# Altium PCB 磁导航.PcbDoc
Units mm, origin at the board's own origin, x right, y up, seen from the top; angles counter-clockwise.
Board outline 145 x 32 mm, 2 copper layers (Top Layer, Bottom Layer); 167 components, 149 nets, 519 pads, 3 vias.
Unrouted connection lines stored in the file: 330.
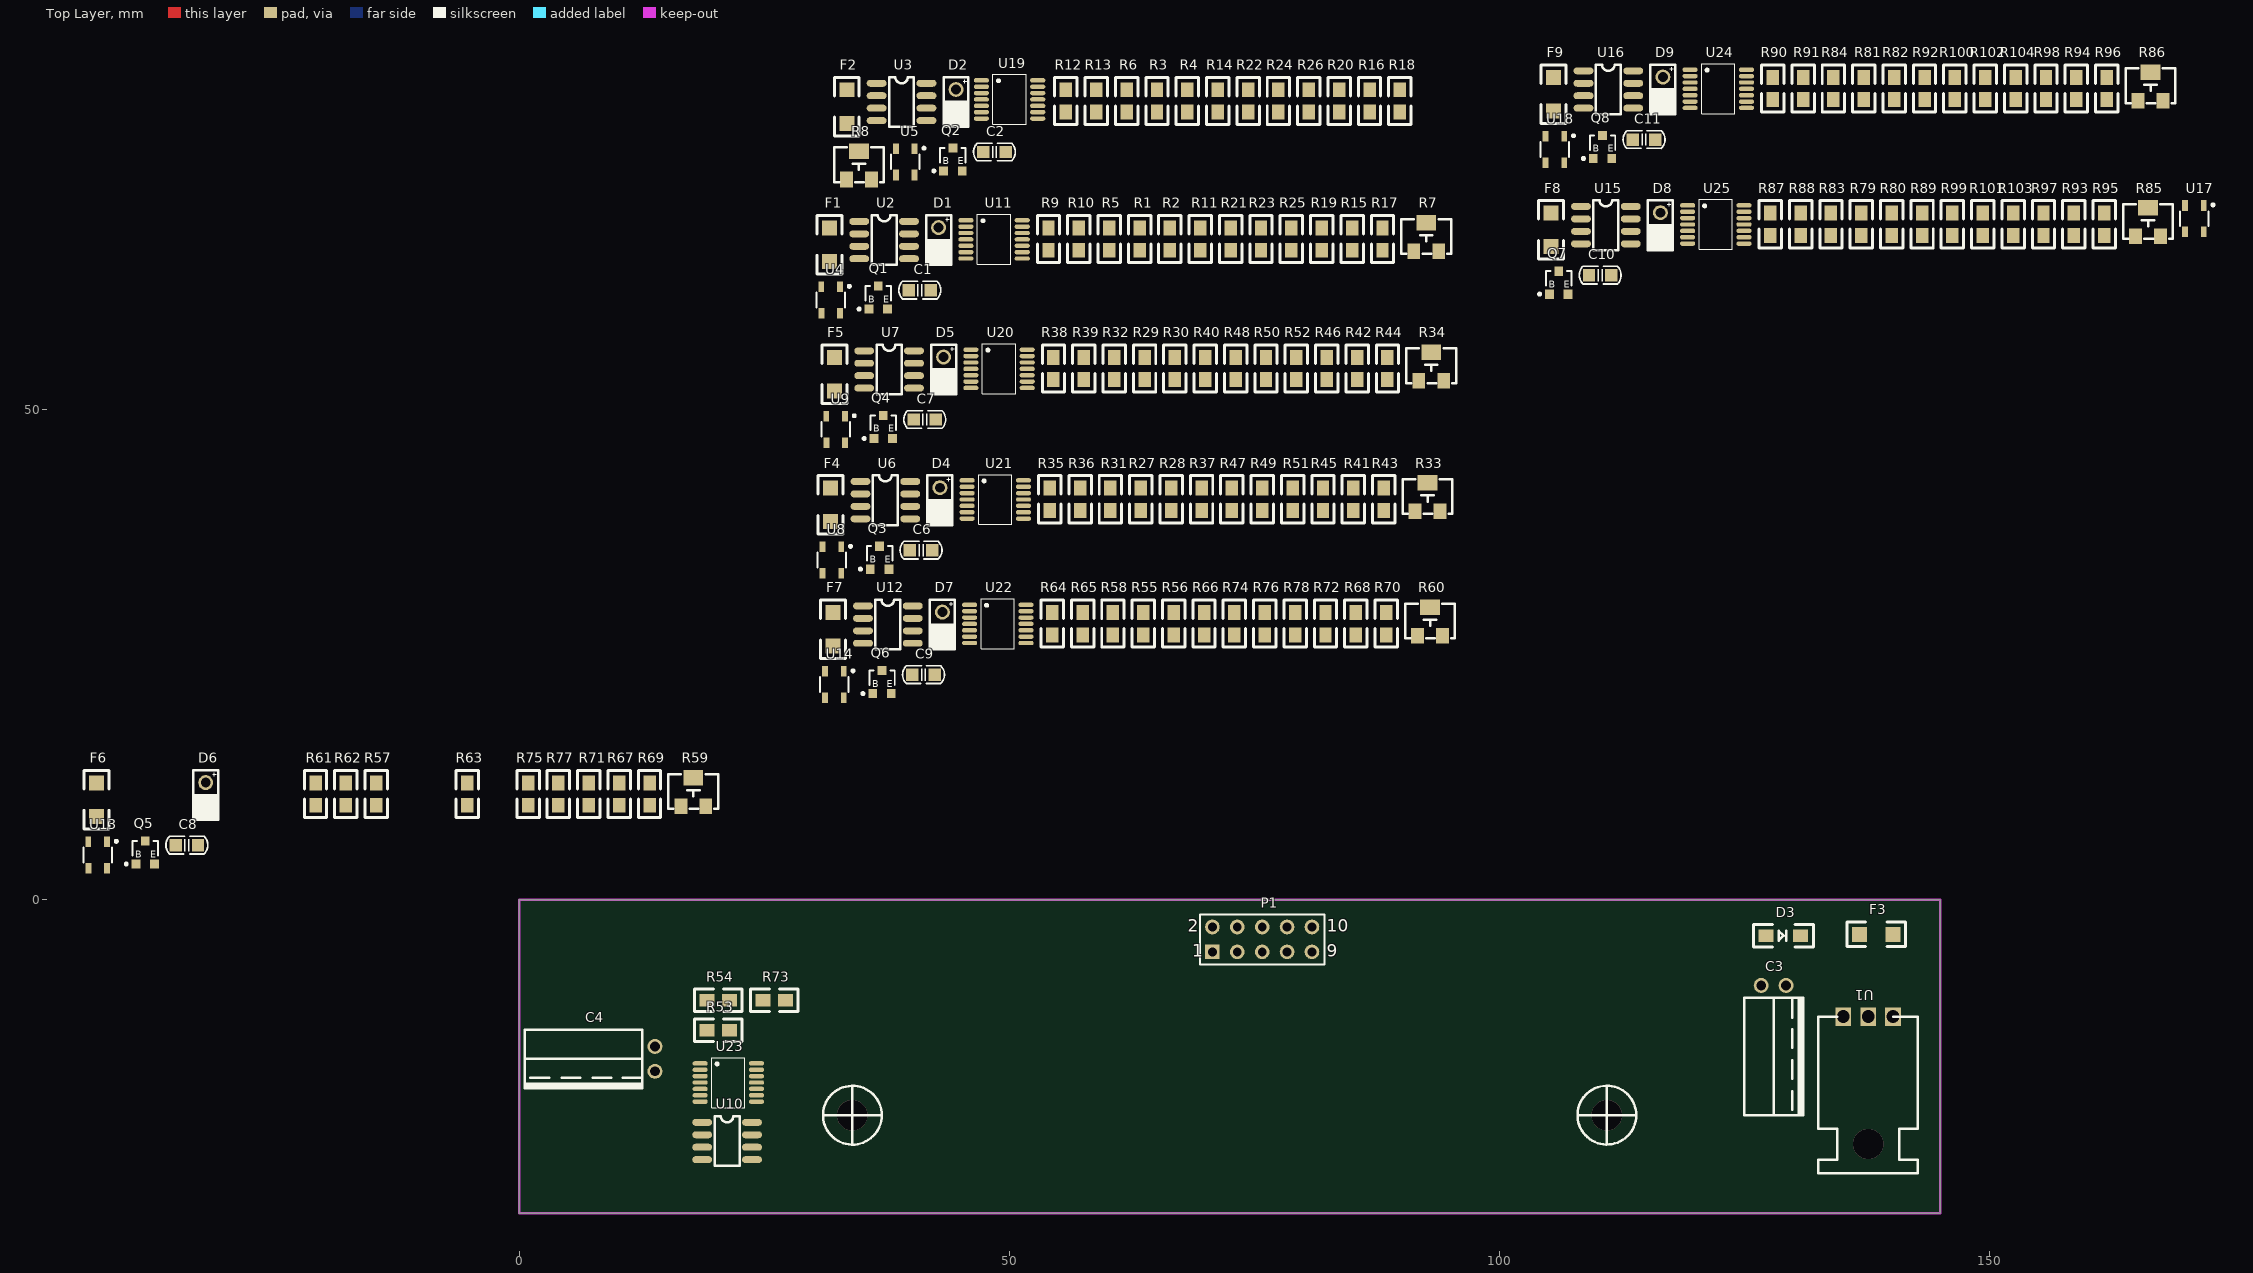
[diagram p0: Top Layer view]
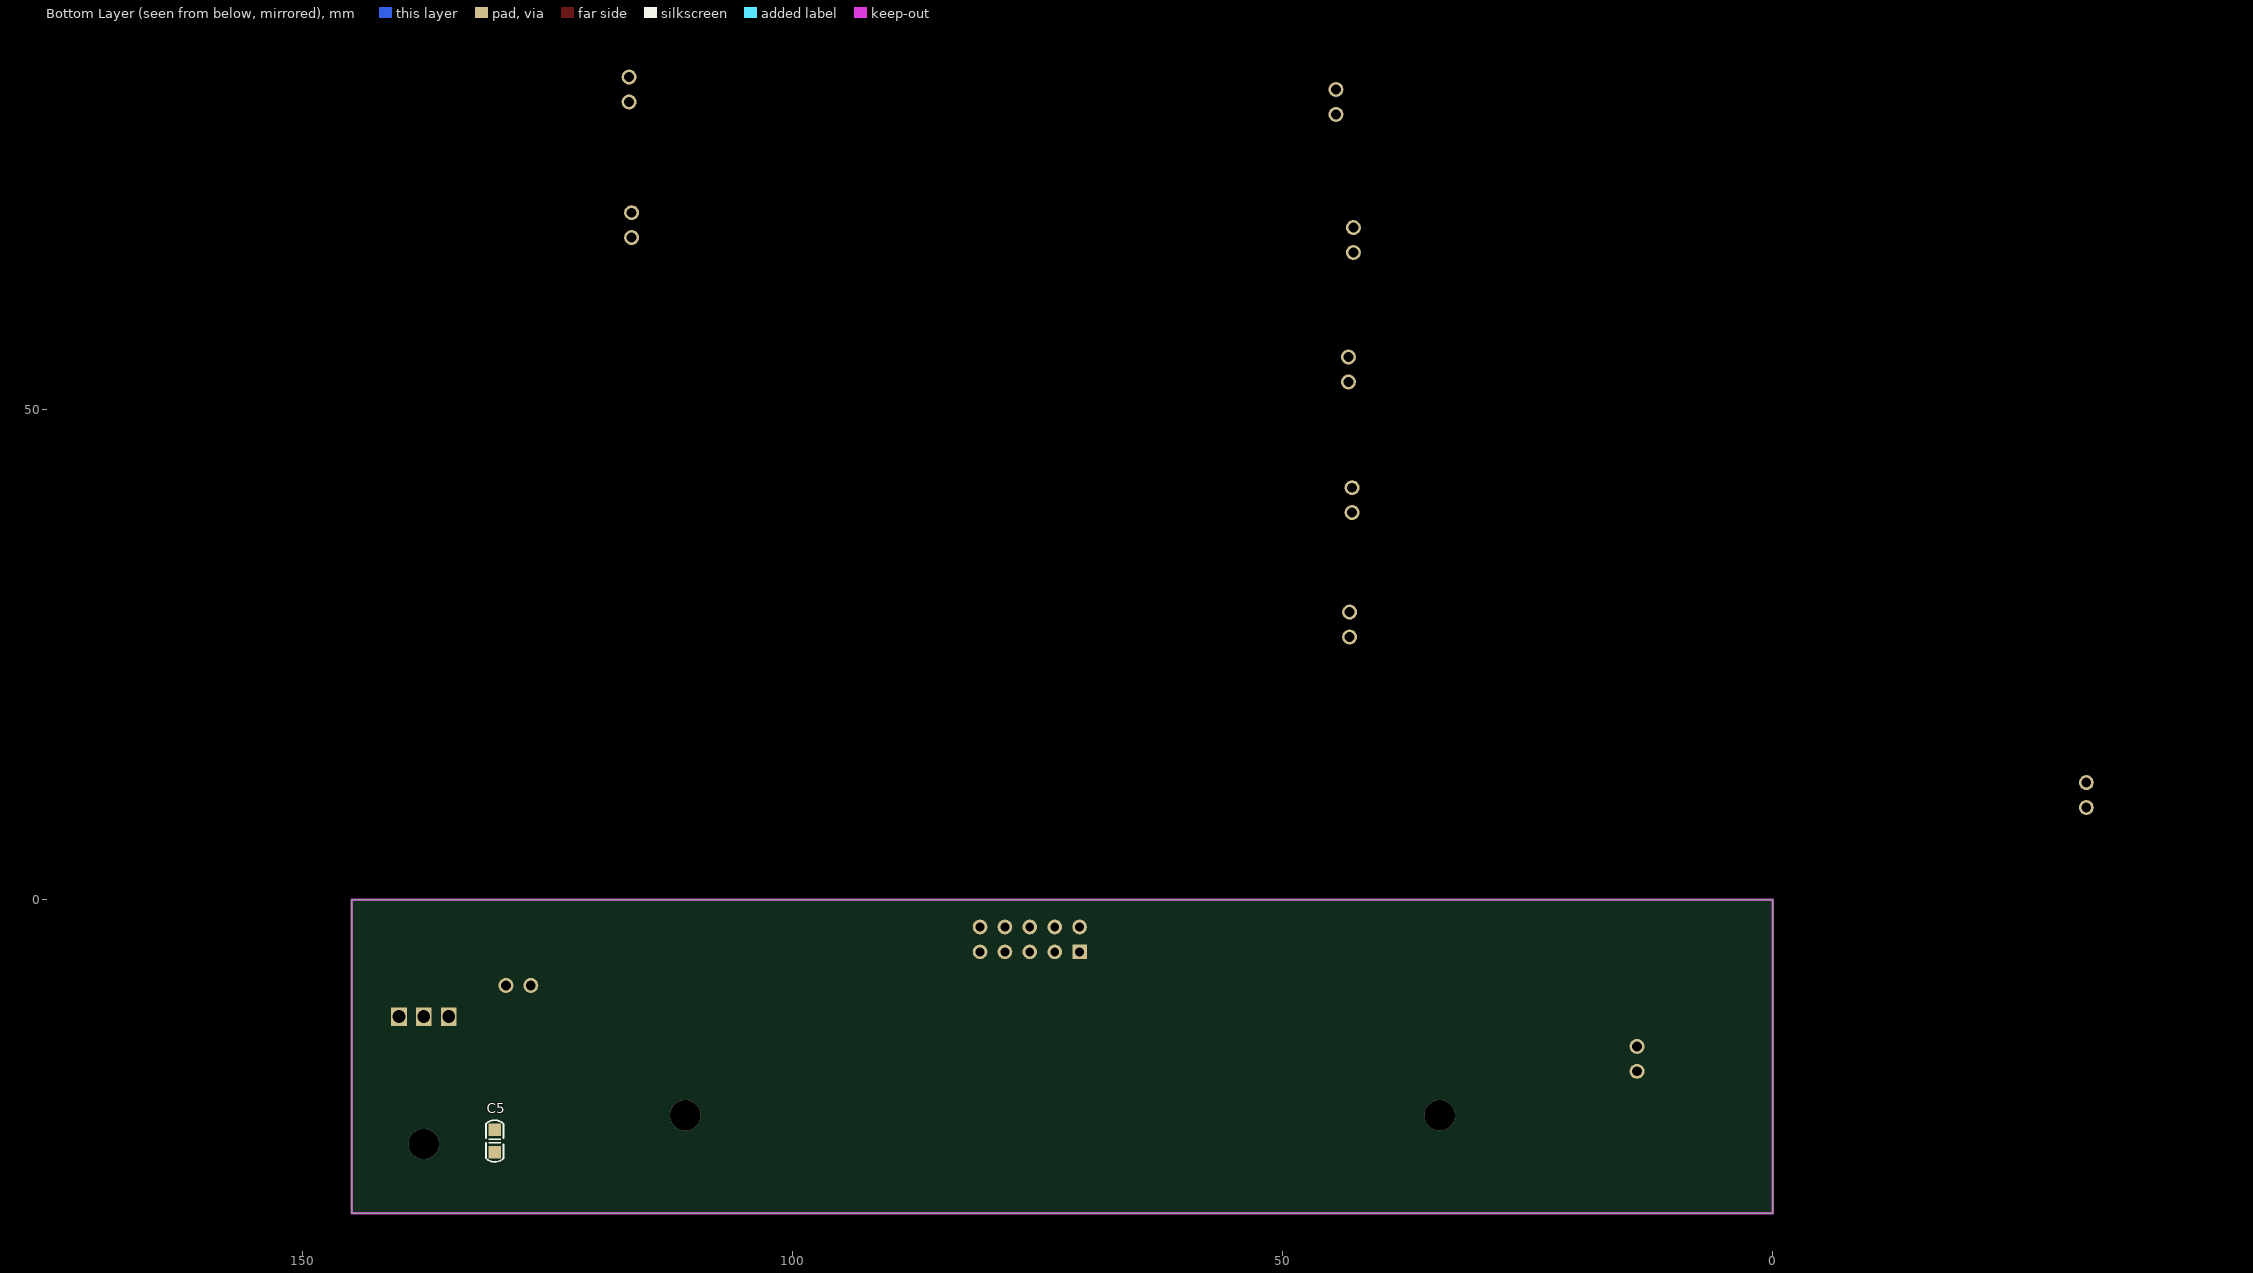
[diagram p1: Bottom Layer view, seen from below]

## Layer stack, top to bottom
Top Layer: signal copper 0.0356
Dielectric: dielectric 0.32, FR-4, Dk 4.8
Bottom Layer: signal copper 0.0356

## Board outline
0,-32 145,-32 145,0 0,0

## Design rules (kind name [scope] priority, off if disabled: settings)
Clearance [All] p1: gap=0.254
PolygonConnect [All] p1: connectstyle=Relief reliefconductorwidth=0.254 reliefentries=4 polygonreliefangle="90 Angle"
RoutingVias [All] p1: holewidth=0.711 width=1.27 viastyle="Through Hole" minholewidth=0.711 minwidth=1.27 maxholewidth=0.711 maxwidth=1.27
SilkscreenOverComponentPads [All] p1: minsilkscreentomaskgap=0.254
SolderMaskExpansion [All] p1: expansion=0.102
Width [All] p1: maxlimit=0.254 minlimit=0.254 preferedwidth=0.254
27 further rules are at their usual default settings.

## Components (designator, comment, footprint, x,y, rotation, side; value= is the part's Value field where it differs from the comment)
C1 "Cap Semi" C0805 40.874,62.203 r0 top
C2 "Cap Semi" C0805 48.494,76.3 r0 top
C3 "Cap Pol3" CAP-6*12 129.286,-8.763 r180 top
C4 "Cap Pol3" CAP-6*12 13.843,-17.526 r90 top
C5 "Cap Semi" C0805 130.429,-24.638 r90 bottom
C6 "Cap Semi" C0805 41.001,35.66 r0 top
C7 "Cap Semi" C0805 41.382,48.995 r0 top
C8 "Cap Semi" C0805 -33.929,5.561 r0 top
C9 "Cap Semi" C0805 41.255,22.96 r0 top
C10 "Cap Semi" C0805 110.319,63.727 r0 top
C11 "Cap Semi" C0805 114.788,77.57 r0 top
D1 "LED0" LED1 42.799,66.04 r90 top
D2 "LED0" LED1 44.577,80.137 r90 top
D3 "1N4007" DIDOE 127.254,-3.683 r0 top
D4 "LED0" LED1 42.926,39.497 r90 top
D5 "LED0" LED1 43.307,52.832 r90 top
D6 "LED0" LED1 -32.004,9.398 r90 top
D7 "LED0" LED1 43.18,26.797 r90 top
D8 "LED0" LED1 116.459,67.564 r90 top
D9 "LED0" LED1 116.713,81.407 r90 top
F1 "Fuse 1" 1206 31.633,65.12 r90 top
F2 "Fuse 1" 1206 33.411,79.217 r90 top
F3 "Fuse 1" 1206 140.208,-3.556 r180 top
F4 "Fuse 1" 1206 31.76,38.577 r90 top
F5 "Fuse 1" 1206 32.141,51.912 r90 top
F6 "Fuse 1" 1206 -43.17,8.478 r90 top
F7 "Fuse 1" 1206 32.014,25.877 r90 top
F8 "Fuse 1" 1206 105.293,66.644 r90 top
F9 "Fuse 1" 1206 105.547,80.487 r90 top
P1 "Header 5X2" HDR2X5 70.739,-5.334 r0 top
Q1 "NPN" SOT-23 36.641,61.317 r0 top
Q2 "NPN" SOT-23 44.261,75.414 r0 top
Q3 "NPN" SOT-23 36.768,34.774 r0 top
Q4 "NPN" SOT-23 37.149,48.109 r0 top
Q5 "NPN" SOT-23 -38.162,4.675 r0 top
Q6 "NPN" SOT-23 37.022,22.074 r0 top
Q7 "NPN" SOT-23 106.086,62.841 r0 top
Q8 "NPN" SOT-23 110.555,76.684 r0 top
R1 "Res2" 0805 63.307,66.269 r90 top
R2 "Res2" 0805 66.406,66.269 r90 top
R3 "Res2" 0805 65.085,80.366 r90 top
R4 "Res2" 0805 68.184,80.366 r90 top
R5 "Res2" 0805 60.208,66.269 r90 top
R6 "Res2" 0805 61.986,80.366 r90 top
R7 "Res Tap" 3224W 92.568,69.075 r0 top
R8 "Res Tap" 3224W 34.671,76.391 r0 top
R9 "Res2" 0805 54.011,66.269 r90 top
R10 "Res2" 0805 57.109,66.269 r90 top
R11 "Res2" 0805 69.505,66.269 r90 top
R12 "Res2" 0805 55.789,80.366 r90 top
R13 "Res2" 0805 58.887,80.366 r90 top
R14 "Res2" 0805 71.283,80.366 r90 top
R15 "Res2" 0805 84.999,66.269 r90 top
R16 "Res2" 0805 86.777,80.366 r90 top
R17 "Res2" 0805 88.097,66.269 r90 top
R18 "Res2" 0805 89.875,80.366 r90 top
R19 "Res2" 0805 81.9,66.269 r90 top
R20 "Res2" 0805 83.678,80.366 r90 top
R21 "Res2" 0805 72.603,66.269 r90 top
R22 "Res2" 0805 74.381,80.366 r90 top
R23 "Res2" 0805 75.702,66.269 r90 top
R24 "Res2" 0805 77.48,80.366 r90 top
R25 "Res2" 0805 78.801,66.269 r90 top
R26 "Res2" 0805 80.579,80.366 r90 top
R27 "Res2" 0805 63.434,39.726 r90 top
R28 "Res2" 0805 66.533,39.726 r90 top
R29 "Res2" 0805 63.815,53.061 r90 top
R30 "Res2" 0805 66.914,53.061 r90 top
R31 "Res2" 0805 60.335,39.726 r90 top
R32 "Res2" 0805 60.716,53.061 r90 top
R33 "Res Tap" 3224W 92.695,42.532 r0 top
R34 "Res Tap" 3224W 93.076,55.867 r0 top
R35 "Res2" 0805 54.138,39.726 r90 top
R36 "Res2" 0805 57.236,39.726 r90 top
R37 "Res2" 0805 69.632,39.726 r90 top
R38 "Res2" 0805 54.519,53.061 r90 top
R39 "Res2" 0805 57.617,53.061 r90 top
R40 "Res2" 0805 70.013,53.061 r90 top
R41 "Res2" 0805 85.126,39.726 r90 top
R42 "Res2" 0805 85.507,53.061 r90 top
R43 "Res2" 0805 88.224,39.726 r90 top
R44 "Res2" 0805 88.605,53.061 r90 top
R45 "Res2" 0805 82.027,39.726 r90 top
R46 "Res2" 0805 82.408,53.061 r90 top
R47 "Res2" 0805 72.73,39.726 r90 top
R48 "Res2" 0805 73.111,53.061 r90 top
R49 "Res2" 0805 75.829,39.726 r90 top
R50 "Res2" 0805 76.21,53.061 r90 top
R51 "Res2" 0805 78.928,39.726 r90 top
R52 "Res2" 0805 79.309,53.061 r90 top
R53 "Res2" 0805 21.463,-13.335 r180 top
R54 "Res2" 0805 19.177,-10.287 r0 top
R55 "Res2" 0805 63.688,27.026 r90 top
R56 "Res2" 0805 66.787,27.026 r90 top
R57 "Res2" 0805 -14.595,9.627 r90 top
R58 "Res2" 0805 60.589,27.026 r90 top
R59 "Res Tap" 3224W 17.765,12.433 r0 top
R60 "Res Tap" 3224W 92.949,29.832 r0 top
R61 "Res2" 0805 -20.792,9.627 r90 top
R62 "Res2" 0805 -17.694,9.627 r90 top
R63 "Res2" 0805 -5.298,9.627 r90 top
R64 "Res2" 0805 54.392,27.026 r90 top
R65 "Res2" 0805 57.49,27.026 r90 top
R66 "Res2" 0805 69.886,27.026 r90 top
R67 "Res2" 0805 10.196,9.627 r90 top
R68 "Res2" 0805 85.38,27.026 r90 top
R69 "Res2" 0805 13.294,9.627 r90 top
R70 "Res2" 0805 88.478,27.026 r90 top
R71 "Res2" 0805 7.097,9.627 r90 top
R72 "Res2" 0805 82.281,27.026 r90 top
R73 "Res2" 0805 24.892,-10.287 r0 top
R74 "Res2" 0805 72.984,27.026 r90 top
R75 "Res2" 0805 0.899,9.627 r90 top
R76 "Res2" 0805 76.083,27.026 r90 top
R77 "Res2" 0805 3.998,9.627 r90 top
R78 "Res2" 0805 79.182,27.026 r90 top
R79 "Res2" 0805 136.967,67.793 r90 top
R80 "Res2" 0805 140.066,67.793 r90 top
R81 "Res2" 0805 137.221,81.636 r90 top
R82 "Res2" 0805 140.32,81.636 r90 top
R83 "Res2" 0805 133.868,67.793 r90 top
R84 "Res2" 0805 134.122,81.636 r90 top
R85 "Res Tap" 3224W 166.228,70.599 r0 top
R86 "Res Tap" 3224W 166.482,84.442 r0 top
R87 "Res2" 0805 127.671,67.793 r90 top
R88 "Res2" 0805 130.769,67.793 r90 top
R89 "Res2" 0805 143.165,67.793 r90 top
R90 "Res2" 0805 127.925,81.636 r90 top
R91 "Res2" 0805 131.023,81.636 r90 top
R92 "Res2" 0805 143.419,81.636 r90 top
R93 "Res2" 0805 158.659,67.793 r90 top
R94 "Res2" 0805 158.913,81.636 r90 top
R95 "Res2" 0805 161.757,67.793 r90 top
R96 "Res2" 0805 162.011,81.636 r90 top
R97 "Res2" 0805 155.56,67.793 r90 top
R98 "Res2" 0805 155.814,81.636 r90 top
R99 "Res2" 0805 146.263,67.793 r90 top
R100 "Res2" 0805 146.517,81.636 r90 top
R101 "Res2" 0805 149.362,67.793 r90 top
R102 "Res2" 0805 149.616,81.636 r90 top
R103 "Res2" 0805 152.461,67.793 r90 top
R104 "Res2" 0805 152.715,81.636 r90 top
U1 "L7808" TO-220 140.208,-11.938 r180 top
U2 "LM317" SO-8 34.696,69.215 r0 top
U3 "LM317" SO-8 36.474,83.312 r0 top
U4 "HW-101A" SOT-23-4 31.776,61.194 r0 top
U5 "HW-101A" SOT-23-4 39.396,75.291 r0 top
U6 "LM317" SO-8 34.823,42.672 r0 top
U7 "LM317" SO-8 35.204,56.007 r0 top
U8 "HW-101A" SOT-23-4 31.903,34.651 r0 top
U9 "HW-101A" SOT-23-4 32.284,47.986 r0 top
U10 "LM317" SO-8 18.669,-22.733 r0 top
U11 "TLC2264" TSSOP14 48.456,67.377 r0 top
U12 "LM317" SO-8 35.077,29.972 r0 top
U13 "HW-101A" SOT-23-4 -43.027,4.552 r0 top
U14 "HW-101A" SOT-23-4 32.157,21.951 r0 top
U15 "LM317" SO-8 108.356,70.739 r0 top
U16 "LM317" SO-8 108.61,84.582 r0 top
U17 "HW-101A" SOT-23-4 170.953,69.499 r0 top
U18 "HW-101A" SOT-23-4 105.69,76.561 r0 top
U19 "TLC2264" TSSOP14 50.038,81.661 r0 top
U20 "TLC2264" TSSOP14 48.964,54.169 r0 top
U21 "TLC2264" TSSOP14 48.583,40.834 r0 top
U22 "TLC2264" TSSOP14 48.837,28.134 r0 top
U23 "TLC2264" TSSOP14 21.336,-18.669 r0 top
U24 "TLC2264" TSSOP14 122.37,82.744 r0 top
U25 "TLC2264" TSSOP14 122.116,68.901 r0 top

## Footprints (in the part's own frame and the unit in brackets; to place one, negate y for a bottom-side part, rotate by r counter-clockwise, add the part's x,y. Pads: shape width x height; smd on the part's side, far side on the other; paste and mask are expansions set on the pad)
0805 [mil]
  rect 60x50 smd: 1(0,0) 2(90,0)
  silkscreen extent -50,-45 140,45
1206 [mil]
  rect 60x60 smd: 1(0.22,-0.6) 2(135.22,-0.6)
  silkscreen extent -50,-51 185,49
3224W [mm] "SOT23, 3-Leads, Body 3.0x2.6mm (max), Pitch 0.95mm, IPC Medium Densi"
  rect 1.3x1.6 smd: 1(-1.27,-2.9) 2(1.27,-2.9)
  rect 2x1.6 smd: 3(0,0)
  silkscreen extent -2.54,-3.17 2.54,0.38
C0805 [mil]
  rect 50x50 smd: 1(-45,0) 2(45,0)
  silkscreen extent -84,-36 84,36, body extent -39,-25 40,24, height 20
CAP-6*12 [mil]
  round 60 hole 39.37: 1(0,0) 2(100,0)
  silkscreen extent -68,50 168,522
DIDOE [mil]
  rect 60x50 smd: 1(0,0) 2(137.8,0)
  silkscreen extent -50,-45 190,45
HDR2X5 [mm] "Connector; Header; 5x2 Positi"
  rect 1.5x1.5 hole 0.9: 1(0,0)
  round 1.5 hole 0.9: 2(0,2.54) 3(2.54,0) 4(2.54,2.54) 5(5.08,0) 6(5.08,2.54) 7(7.62,0) 8(7.62,2.54) 9(10.16,0) 10(10.16,2.54)
  silkscreen extent -1.27,-1.27 11.43,3.81
LED1 [mil]
  round 60 hole 39.37: 1(100,0) 2(0,0)
  silkscreen extent -50,-50 150,50
SO-8 [mil]
  oval 80x28 smd: 1(0,0) 2(0,-50) 3(0,-100) 4(0,-150) 5(200,-150) 6(200,-100) 7(200,-50) 8(200,0)
  silkscreen extent 50,-175 150,25
SOT-23 [mm]
  rect 0.9x0.95 smd: 1(0,1.302) 2(-0.95,-1.048) 3(0.95,-1.048)
  silkscreen extent -2.07,-1.17 1.3,1.3
SOT-23-4 [mm] "SOT143, 4-Leads, Body 2.9x2.9mm (max), Pitch 1.92mm, IPC Medium De"
  rect 0.6x1.1 smd: 1(0.96,1.35) 2(-0.96,1.35) 3(-0.94,-1.35) 4(0.96,-1.35)
  silkscreen extent -1.45,-0.75 2.03,1.52, body extent -1.45,-0.77 1.45,0.77, height 1.2
TO-220 [mm]
  rect 1.6x1.9 hole 1.3: 1(0,0) 2(2.54,0) 3(5.08,0)
  silkscreen extent -2.54,0 7.62,16
TSSOP14 [mm]
  oval 1.55x0.45 smd: 1(-2.875,1.95) 2(-2.875,1.3) 3(-2.875,0.65) 4(-2.875,0) 5(-2.875,-0.65) 6(-2.875,-1.3) 7(-2.875,-1.95) 8(2.875,-1.95) 9(2.875,-1.3) 10(2.875,-0.65) 11(2.875,0) 12(2.875,0.65) 13(2.875,1.3) 14(2.875,1.95)
  silkscreen extent -1.7,-2.55 1.7,2.55, body extent -2.25,-2.55 2.25,2.55, height 2.65

## Part data
C1 C2 C5 C6 C7 C8 C9 C10 C11: "Capacitor (Semiconductor SIM Mode"
C3 C4: "Polarized Capacitor (Surface Moun"
D1 D2 D4 D5 D6 D7 D8 D9: "Typical INFRARED GaAs L"
D3: library part "Diode 1N4007", "1 Amp General Purpose Rectifi"
F1 F2 F3 F4 F5 F6 F7 F8 F9: "Fu"
P1: "Header, 5-Pin, Dual row"
Q1 Q2 Q3 Q4 Q5 Q6 Q7 Q8: "NPN Bipolar Transist"
R1 R2 R3 R4 R5 R6 R9 R10 R11 R12 R13 R14 R15 R16 R17 R18 R19 R20 R21 R22 R23 R24 R25 R26 R27 R28 R29 R30 R31 R32 R35 R36 R37 R38 R39 R40 R41 R42 R43 R44 R45 R46 R47 R48 R49 R50 R51 R52 R53 R54 R55 R56 R57 R58 R61 R62 R63 R64 R65 R66 R67 R68 R69 R70 R71 R72 R73 R74 R75 R76 R77 R78 R79 R80 R81 R82 R83 R84 R87 R88 R89 R90 R91 R92 R93 R94 R95 R96 R97 R98 R99 R100 R101 R102 R103 R104: "Resist"
R7 R8 R33 R34 R59 R60 R85 R86: "Tapped Resistor"
U11 U19 U20 U21 U22 U23 U24 U25: library part TLC22

## Via types
v1: diameter 3.1, hole 3.1, Top Layer to Bottom Layer, 3 vias

## Nets (pads, with @x,y where several pads share a name; then routed paths per layer and width w, separated by ;. In a path a pad name is that pad's centre, name@x,y a point inside that pad or via, vN(x,y) a via of type N, cw(c..) or ccw(c..) an arc to the next point about the centre after c; other vN are vias at no path point)
CDH1: F2.2 P1.1
CDH2: F1.2 P1.2
CDH3: F5.2 P1.3
CDH4: F4.2 P1.4
CDH5: F7.2 P1.5
CDH6: F6.2 P1.6
CDH7: F9.2 P1.7
CDH8: F8.2 P1.8
GND: C1.1 C2.1 C3.2 C4.2 C5.1 C6.1 C7.1 C8.1 C9.1 C10.1 C11.1 P1.9 Q1.3 Q2.3 Q3.3 Q4.3 Q5.3 Q6.3 Q7.3 Q8.3 R19.2 R20.2 R25.1 R26.1 R45.2 R46.2 R51.1 R52.1 R71.2 R72.2 R77.1 R78.1 R97.2 R98.2 R103.1 R104.1 U1.2 U11.11 U19.11 U20.11 U21.11 U22.11 U23.11 U24.11 U25.11
H1_IN1: U5.1
H1_IN3: U5.3 U19.3
H1_OUT2: R18.1 U3.4 U5.2 U19.7
H1_OUT4: R6.1 U3.2 U3.3 U5.4 U19.13
H2_IN1: U4.1
H2_IN3: U4.3 U11.3
H2_OUT2: R17.1 U2.4 U4.2 U11.7
H2_OUT4: R5.1 U2.2 U2.3 U4.4 U11.13
H3_IN1: U9.1
H3_IN3: U9.3 U20.3
H3_OUT2: R44.1 U7.4 U9.2 U20.7
H3_OUT4: R32.1 U7.2 U7.3 U9.4 U20.13
H4_IN1: U8.1
H4_IN3: U8.3 U21.3
H4_OUT2: R43.1 U6.4 U8.2 U21.7
H4_OUT4: R31.1 U6.2 U6.3 U8.4 U21.13
H5_IN1: U14.1
H5_IN3: U14.3 U22.3
H5_OUT2: R70.1 U12.4 U14.2 U22.7
H5_OUT4: R58.1 U12.2 U12.3 U14.4 U22.13
H6_IN1: U13.1
H6_IN3: U13.3 U23.3
H6_OUT2: R69.1 U10.4 U13.2 U23.7
H6_OUT4: R57.1 U10.2 U10.3 U13.4 U23.13
H7_IN1: U18.1
H7_IN3: U18.3 U24.3
H7_OUT2: R96.1 U16.4 U18.2 U24.7
H7_OUT4: R84.1 U16.2 U16.3 U18.4 U24.13
H8_IN1: U17.1
H8_IN3: U17.3 U25.3
H8_OUT2: R95.1 U15.4 U17.2 U25.7
H8_OUT4: R83.1 U15.2 U15.3 U17.4 U25.13
NetC3_1: C3.1 F3.2 U1.1
NetD1_1: D1.1 R21.2 U11.14
NetD1_2: D1.2 R15.1 R19.1
NetD2_1: D2.1 R22.2 U19.14
NetD2_2: D2.2 R16.1 R20.1
NetD3_2: D3.2 F3.1
NetD4_1: D4.1 R47.2 U21.14
NetD4_2: D4.2 R41.1 R45.1
NetD5_1: D5.1 R48.2 U20.14
NetD5_2: D5.2 R42.1 R46.1
NetD6_1: D6.1 R73.2 U23.14
NetD6_2: D6.2 R67.1 R71.1
NetD7_1: D7.1 R74.2 U22.14
NetD7_2: D7.2 R68.1 R72.1
NetD8_1: D8.1 R99.2 U25.14
NetD8_2: D8.2 R93.1 R97.1
NetD9_1: D9.1 R100.2 U24.14
NetD9_2: D9.2 R94.1 R98.1
NetF1_1: F1.1 Q1.1
NetF2_1: F2.1 Q2.1
NetF4_1: F4.1 Q3.1
NetF5_1: F5.1 Q4.1
NetF6_1: F6.1 Q5.1
NetF7_1: F7.1 Q6.1
NetF8_1: F8.1 Q7.1
NetF9_1: F9.1 Q8.1
NetQ1_2: Q1.2 R15.2
NetQ2_2: Q2.2 R16.2
NetQ3_2: Q3.2 R41.2
NetQ4_2: Q4.2 R42.2
NetQ5_2: Q5.2 R67.2
NetQ6_2: Q6.2 R68.2
NetQ7_2: Q7.2 R93.2
NetQ8_2: Q8.2 R94.2
NetR1_1: R1.1 R11.1 U11.2
NetR1_2: R1.2 R2.1 U11.1
NetR2_2: R2.2 R21.1 U11.12
NetR3_1: R3.1 R14.1 U19.2
NetR3_2: R3.2 R4.1 U19.1
NetR4_2: R4.2 R22.1 U19.12
NetR5_2: R5.2 R7.1
NetR6_2: R6.2 R8.1
NetR7_2: R7.2 R17.2
NetR7_3: R7.3 R9.1
NetR8_2: R8.2 R18.2
NetR8_3: R8.3 R12.1
NetR9_2: R9.2 R10.1 U11.5
NetR10_2: R10.2 R11.2 U11.8 U11.9
NetR12_2: R12.2 R13.1 U19.5
NetR13_2: R13.2 R14.2 U19.8 U19.9
NetR23_1: R23.1 R25.2 U11.10
NetR24_1: R24.1 R26.2 U19.10
NetR27_1: R27.1 R37.1 U21.2
NetR27_2: R27.2 R28.1 U21.1
NetR28_2: R28.2 R47.1 U21.12
NetR29_1: R29.1 R40.1 U20.2
NetR29_2: R29.2 R30.1 U20.1
NetR30_2: R30.2 R48.1 U20.12
NetR31_2: R31.2 R33.1
NetR32_2: R32.2 R34.1
NetR33_2: R33.2 R43.2
NetR33_3: R33.3 R35.1
NetR34_2: R34.2 R44.2
NetR34_3: R34.3 R38.1
NetR35_2: R35.2 R36.1 U21.5
NetR36_2: R36.2 R37.2 U21.8 U21.9
NetR38_2: R38.2 R39.1 U20.5
NetR39_2: R39.2 R40.2 U20.8 U20.9
NetR49_1: R49.1 R51.2 U21.10
NetR50_1: R50.1 R52.2 U20.10
NetR53_1: R53.1 R63.1 U23.2
NetR53_2: R53.2 R54.1 U23.1
NetR54_2: R54.2 R73.1 U23.12
NetR55_1: R55.1 R66.1 U22.2
NetR55_2: R55.2 R56.1 U22.1
NetR56_2: R56.2 R74.1 U22.12
NetR57_2: R57.2 R59.1
NetR58_2: R58.2 R60.1
NetR59_2: R59.2 R69.2
NetR59_3: R59.3 R61.1
NetR60_2: R60.2 R70.2
NetR60_3: R60.3 R64.1
NetR61_2: R61.2 R62.1 U23.5
NetR62_2: R62.2 R63.2 U23.8 U23.9
NetR64_2: R64.2 R65.1 U22.5
NetR65_2: R65.2 R66.2 U22.8 U22.9
NetR75_1: R75.1 R77.2 U23.10
NetR76_1: R76.1 R78.2 U22.10
NetR79_1: R79.1 R89.1 U25.2
NetR79_2: R79.2 R80.1 U25.1
NetR80_2: R80.2 R99.1 U25.12
NetR81_1: R81.1 R92.1 U24.2
NetR81_2: R81.2 R82.1 U24.1
NetR82_2: R82.2 R100.1 U24.12
NetR83_2: R83.2 R85.1
NetR84_2: R84.2 R86.1
NetR85_2: R85.2 R95.2
NetR85_3: R85.3 R87.1
NetR86_2: R86.2 R96.2
NetR86_3: R86.3 R90.1
NetR87_2: R87.2 R88.1 U25.5
NetR88_2: R88.2 R89.2 U25.8 U25.9
NetR90_2: R90.2 R91.1 U24.5
NetR91_2: R91.2 R92.2 U24.8 U24.9
NetR101_1: R101.1 R103.2 U25.10
NetR102_1: R102.1 R104.2 U24.10
VCC8: C1.2 C2.2 C4.1 C5.2 C6.2 C7.2 C8.2 C9.2 C10.2 C11.2 R23.2 R24.2 R49.2 R50.2 R75.2 R76.2 R101.2 R102.2 U1.3 U2.1 U3.1 U6.1 U7.1 U10.1 U11.4 U12.1 U15.1 U16.1 U19.4 U20.4 U21.4 U22.4 U23.4 U24.4 U25.4
VCC24: D3.1 P1.10
pads on no net: U2.5 U2.6 U2.7 U2.8 U3.5 U3.6 U3.7 U3.8 U6.5 U6.6 U6.7 U6.8 U7.5 U7.6 U7.7 U7.8 U10.5 U10.6 U10.7 U10.8 U11.6 U12.5 U12.6 U12.7 U12.8 U15.5 U15.6 U15.7 U15.8 U16.5 U16.6 U16.7 U16.8 U19.6 U20.6 U21.6 U22.6 U23.6 U24.6 U25.6
copper on no net:
  other v1: 137.668,-24.938 34,-22.004 110.998,-22

## Keep-outs
Keep-Out Layer:
  the board outline again, w0.254

## Silkscreen, mask and mechanical layers (free items; w line width, h text height)
Top Overlay:
  circle w0.254: c110.998,-22 r3
  circle w0.254: c34,-22.004 r3
  lines w0.254: 31.148,-22.004 34,-22.004 ; 34,-24.928 34,-22.004 ; 34,-19.086 34,-22.004 ; 37,-22.004 34,-22.004 ; 108.106,-22 110.998,-22 ; 110.998,-24.892 110.998,-22 ; 110.998,-19.05 110.998,-22 ; 113.998,-22 110.998,-22

## Text inside footprints (layer, text, board x,y; h text height)
P1: Top Overlay "10" at 82.423,-3.302 h1.27; Top Overlay "9" at 82.423,-5.842 h1.27; Top Overlay "1" at 68.707,-5.842 h1.27; Top Overlay "2" at 68.199,-3.302 h1.27
Q1: Top Overlay "E" at 37.149,60.936 h0.7; Top Overlay "B" at 35.625,60.936 h0.7
Q2: Top Overlay "E" at 44.769,75.033 h0.7; Top Overlay "B" at 43.245,75.033 h0.7
Q3: Top Overlay "E" at 37.276,34.393 h0.7; Top Overlay "B" at 35.752,34.393 h0.7
Q4: Top Overlay "E" at 37.657,47.728 h0.7; Top Overlay "B" at 36.133,47.728 h0.7
Q5: Top Overlay "E" at -37.654,4.294 h0.7; Top Overlay "B" at -39.178,4.294 h0.7
Q6: Top Overlay "E" at 37.53,21.693 h0.7; Top Overlay "B" at 36.006,21.693 h0.7
Q7: Top Overlay "E" at 106.594,62.46 h0.7; Top Overlay "B" at 105.07,62.46 h0.7
Q8: Top Overlay "E" at 111.063,76.303 h0.7; Top Overlay "B" at 109.539,76.303 h0.7